# Altium PCB pad_ecg_pcb.PcbDoc
Units mm, origin at the board's own origin, x right, y up, seen from the top; angles counter-clockwise.
Board outline 16 x 16 mm, 2 copper layers (Top Layer, Bottom Layer); 3 components, 1 nets, 3 pads, 1 vias.
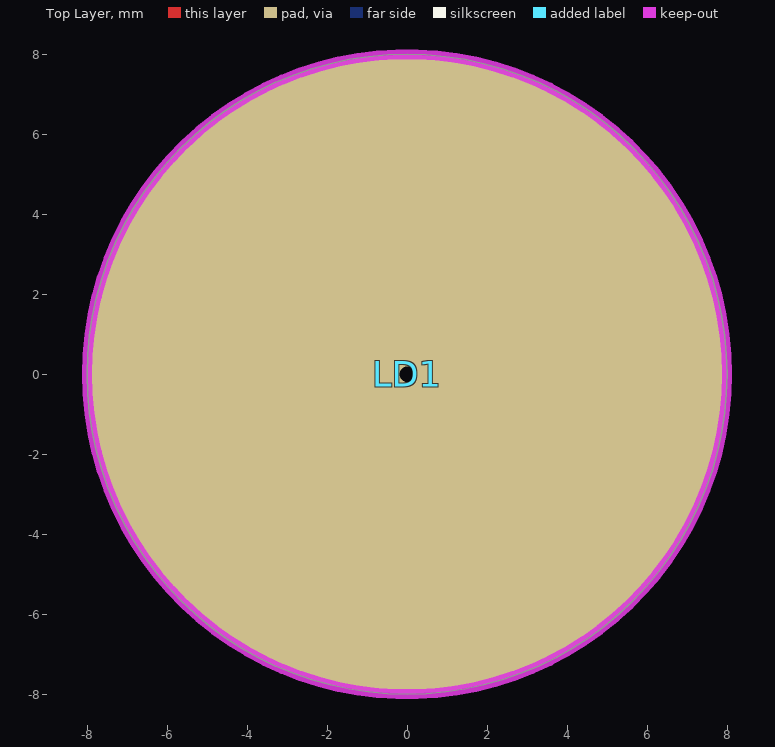
[diagram p0: Top Layer view]
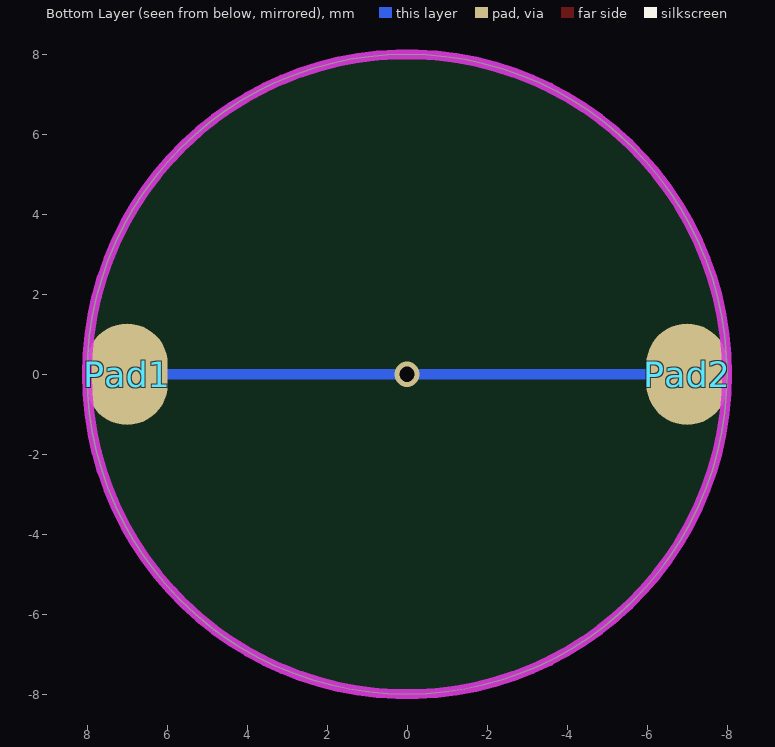
[diagram p1: Bottom Layer view, seen from below]

## Layer stack, top to bottom
Top Solder: solder mask 0.0102, Solder Resist, Dk 3.5
Top Layer: signal copper 0.0356
Dielectric 1: dielectric 0.32, FR-4, Dk 4.8
Bottom Layer: signal copper 0.0356
Bottom Solder: solder mask 0.0102, Solder Resist, Dk 3.5

## Board outline
-8,0 ccw(c0,0) 0,-8 ccw(c0,0) 8,0 ccw(c0,0) 0,8 ccw(c0,0)

## Design rules (kind name [scope] priority, off if disabled: settings)
Clearance [All] p1: gap=0.254
PolygonConnect [All] p1: connectstyle=Relief reliefconductorwidth=0.254 reliefentries=4 polygonreliefangle="90 Angle" airgapwidth=0.254
RoomDefinition pad_ecg_schematic [InComponentClass('pad_ecg_schematic')] p1: confinementstyle=ConfineIn formatcopy=TRUE lockcomponents=FALSE outline 12.827,-9.017 37.719,-9.017 37.719,9.017 12.827,9.017
RoutingVias [All] p1: holewidth=0.381 width=0.635 viastyle="Through Hole" minholewidth=0.381 minwidth=0.635 maxholewidth=0.711 maxwidth=1.27
SolderMaskExpansion [All] p1: expansion=0.102
Width [All] p1: maxlimit=0.254 minlimit=0.254 preferedwidth=0.254
30 further rules are at their usual default settings.

## Components (designator, comment, footprint, x,y, rotation, side; value= is the part's Value field where it differs from the comment)
LD1 "ECG LEAD" "ECG PAD" -18.542,23.876 r90 top
Pad1 "pad_ecg" pad_ecg#1 7.239,2.921 r90 top
Pad2 "pad_ecg" pad_ecg#2 -23.495,-1.016 r90 top

## Footprints (in the part's own frame and the unit in brackets; to place one, negate y for a bottom-side part, rotate by r counter-clockwise, add the part's x,y. Pads: shape width x height; smd on the part's side, far side on the other; paste and mask are expansions set on the pad)
"ECG PAD" [mm]
  round 16 smd mask+0.102: 1(-23.876,-18.542)
pad_ecg#1 [mil]
  oval 100x80 smd far side: 0(-115,9.41)
pad_ecg#2 [mil]
  oval 100x80 smd far side: 0(40,-649.41)

## Via types
v1: diameter 0.635, hole 0.381, Top Layer to Bottom Layer, tented both sides, 1 vias

## Nets (pads, with @x,y where several pads share a name; then routed paths per layer and width w, separated by ;. In a path a pad name is that pad's centre, name@x,y a point inside that pad or via, vN(x,y) a via of type N, cw(c..) or ccw(c..) an arc to the next point about the centre after c; other vN are vias at no path point)
NetLD1_1: LD1.1 Pad1.0 Pad2.0 | length 14
  Bottom Layer w0.254: Pad2.0 v1(0,0) Pad1.0

## Keep-outs
Keep-Out Layer:
  circle w0.254: c0,0 r8